# Altium PCB PCB-rev3.PcbDoc
Units mil, origin at the board's own origin, x right, y up, seen from the top; angles counter-clockwise.
Board outline 2110 x 2435.83 mil, 2 copper layers (Top Layer, Bottom Layer); 24 components, 81 nets, 312 pads, 171 vias.
Unrouted connection lines stored in the file: 1.
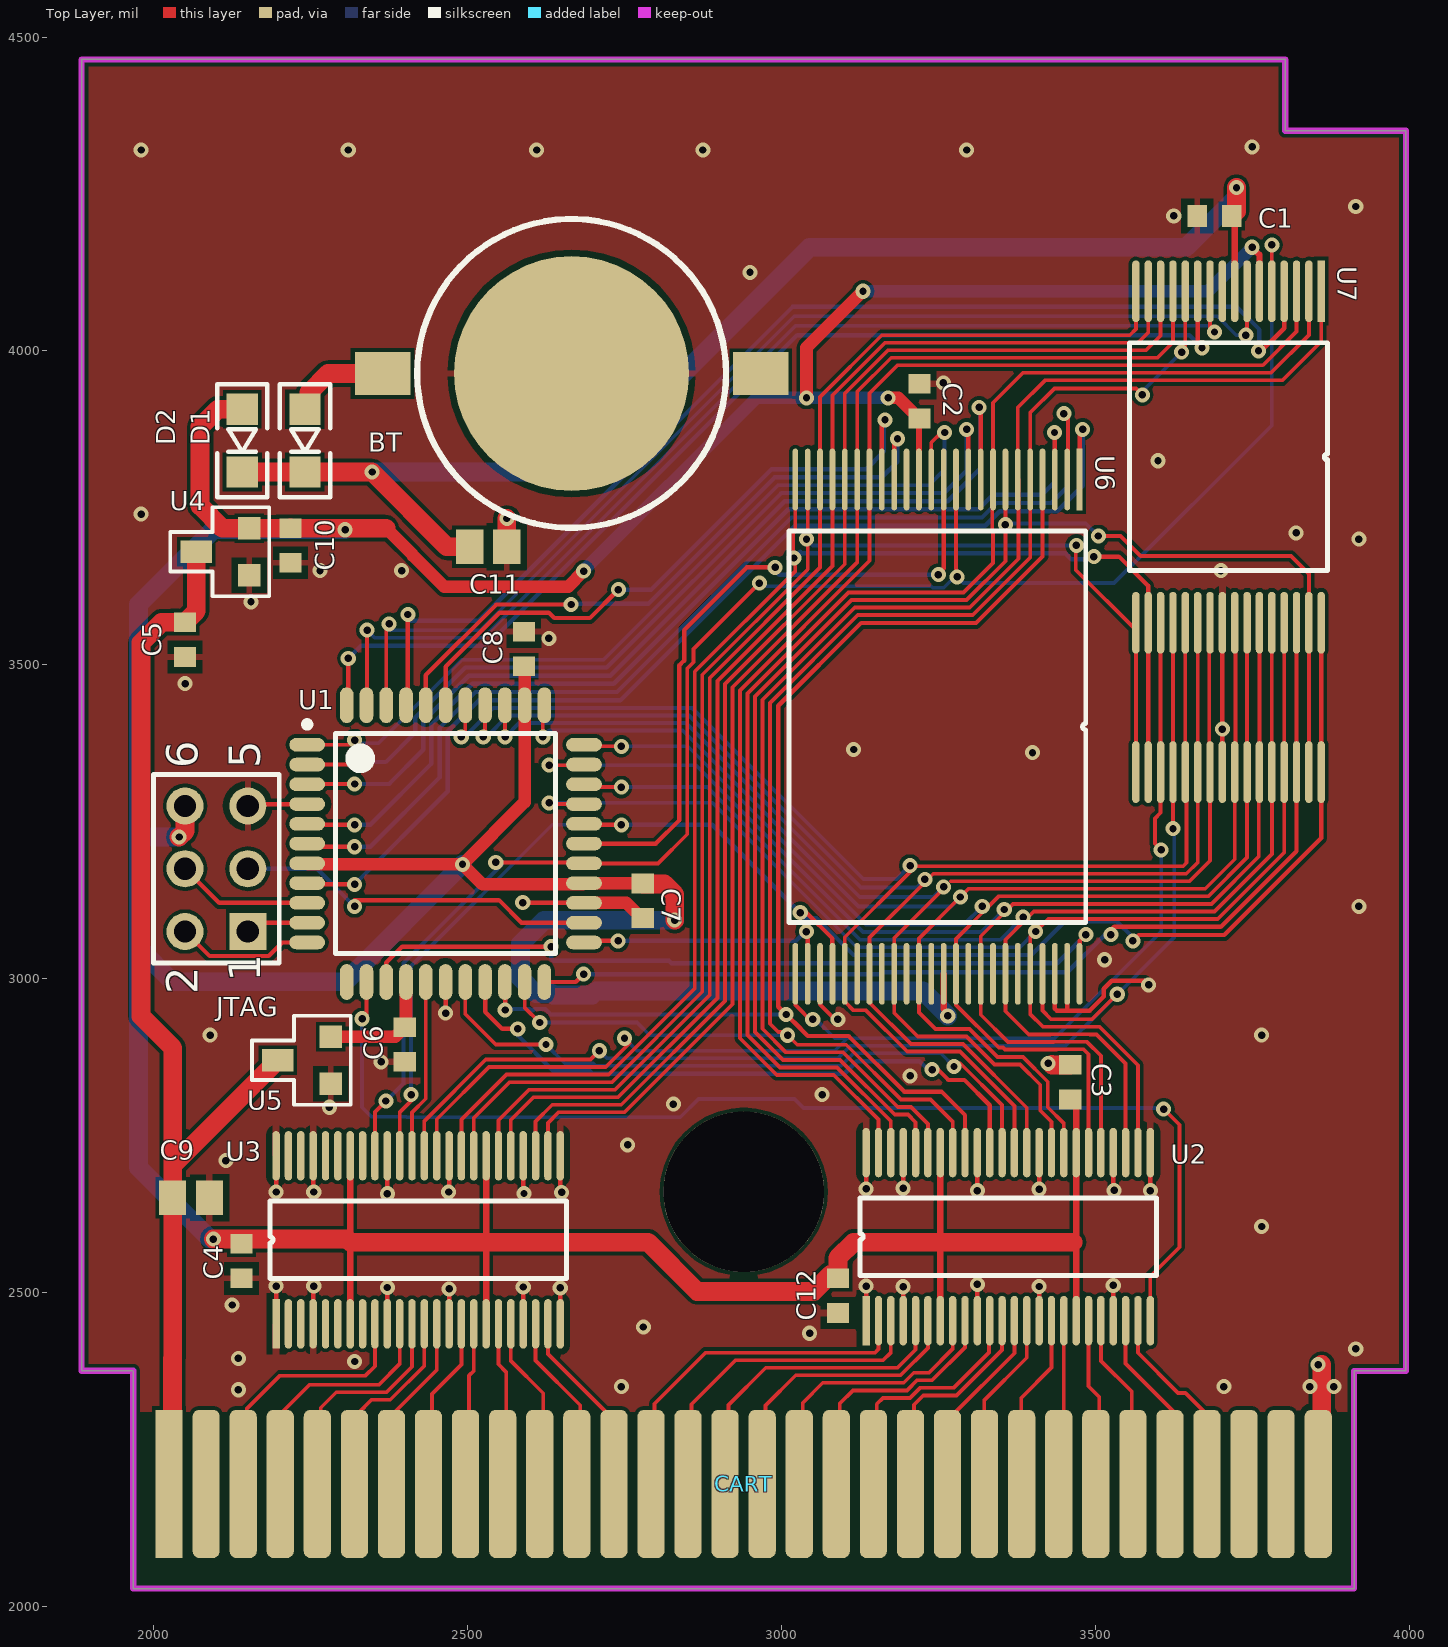
[diagram p0: Top Layer view]
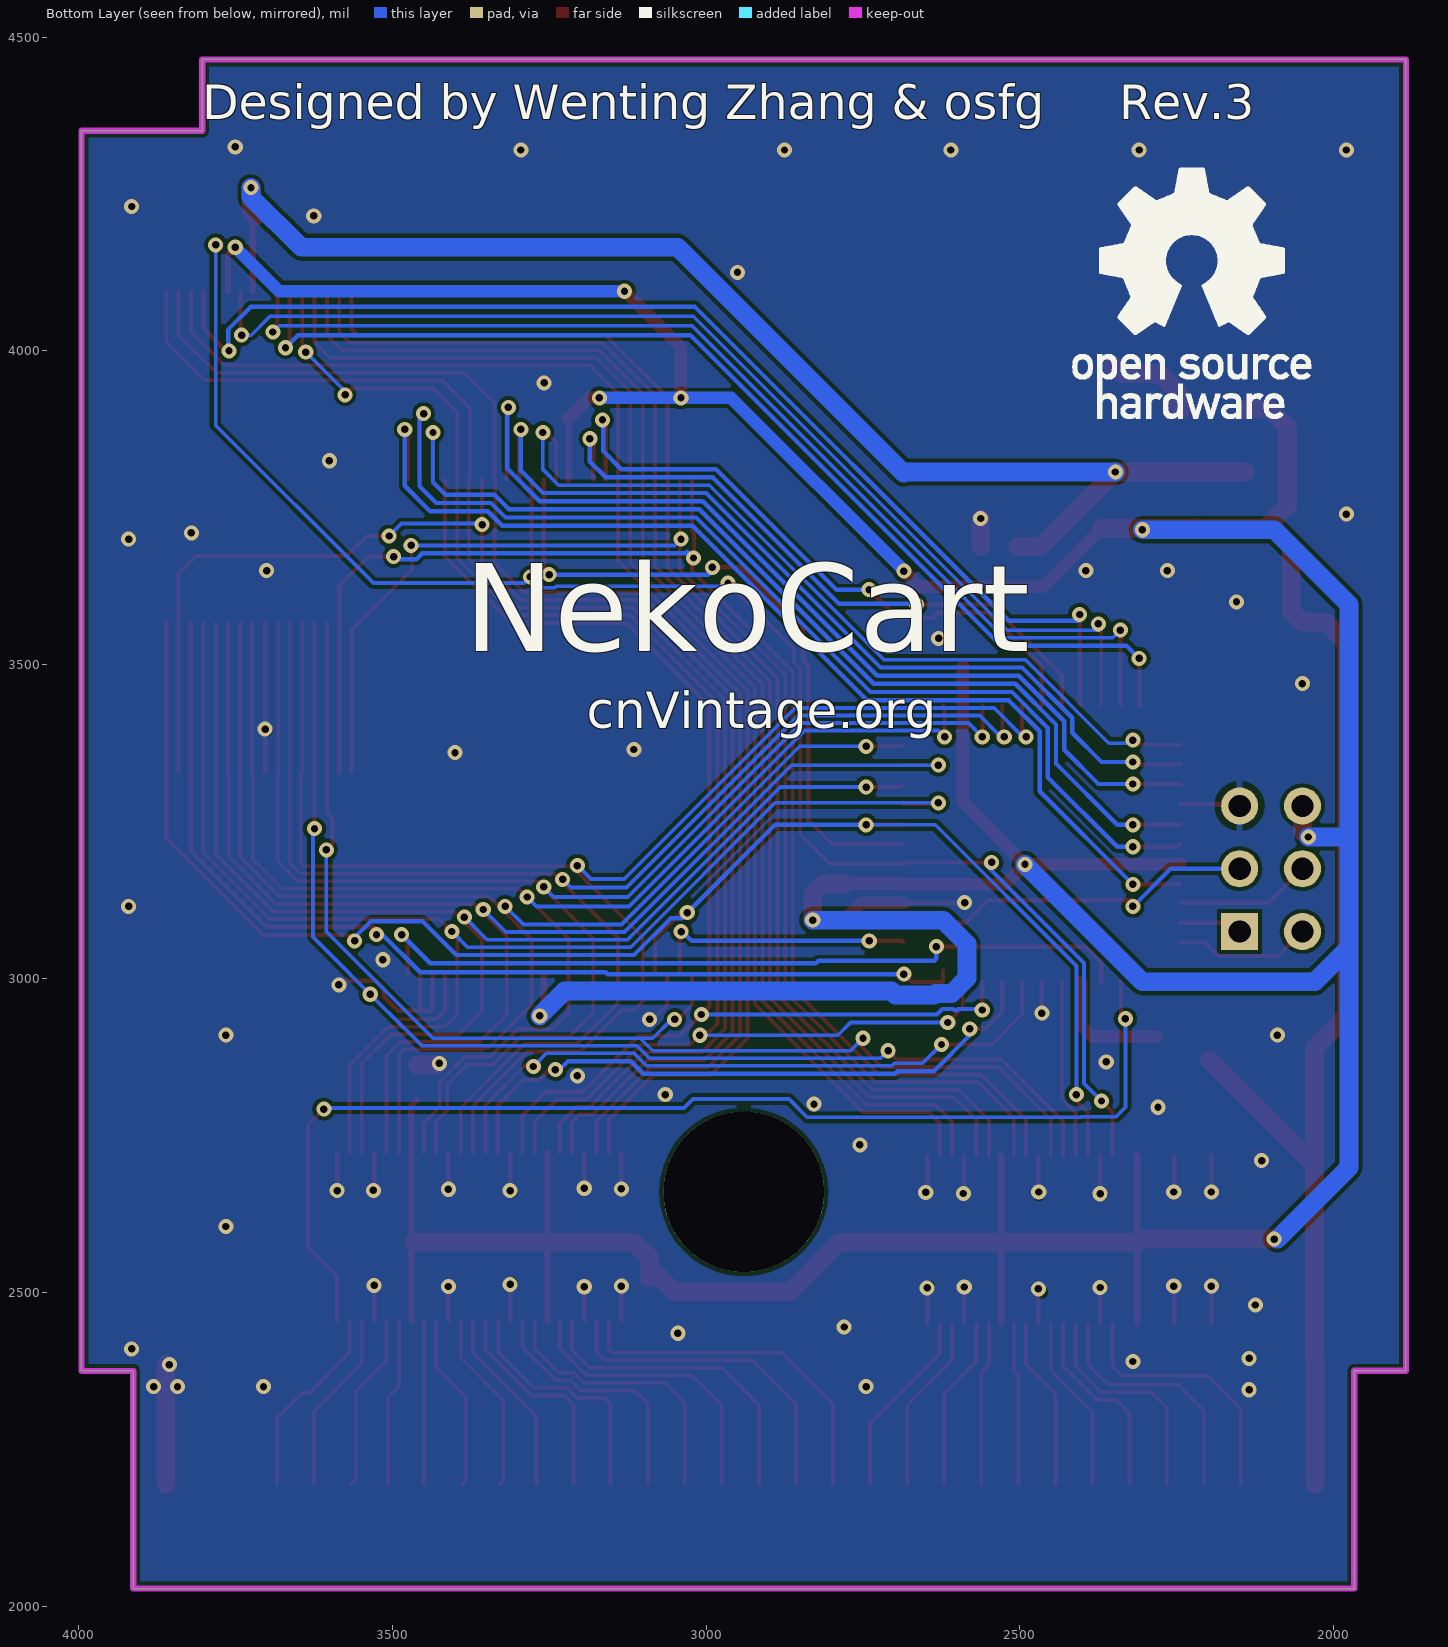
[diagram p1: Bottom Layer view, seen from below]

## Layer stack, top to bottom
Top Solder: solder mask 0.4, Solder Resist, Dk 3.5
Top Layer: signal copper 1.4
Dielectric 1: dielectric 12.6, FR-4, Dk 4.8
Bottom Layer: signal copper 1.4
Bottom Solder: solder mask 0.4, Solder Resist, Dk 3.5

## Board outline
1967.4,2028.35 1967.4,2375.16 1885.04,2375.16 1885.04,4464.17 1885,4464.17 3802.56,4464.17 3802.56,4350.55 3995,4350.55 3995,2375 3912.36,2375 3912.36,2028.35

## Design rules (kind name [scope] priority, off if disabled: settings)
Clearance [All] p1: gap=6 ignorepadtopadclearanceinfootprint=FALSE except(0: Arc-Hole Track-Hole SMDPad-Hole THPad-Hole Via-Hole Fill-Hole Poly-Hole Region-Hole Text-Hole)
ComponentClearance [All] p1 off: gap=10 collisioncheckmode=3 verticalgap=10 showdistances=FALSE
HoleSize [All] p1: absolutevalues=TRUE maxlimit=400 minlimit=11.81 maxpercent=80.000 minpercent=20.000
MinimumSolderMaskSliver [All] p1 off: minsoldermaskwidth=10
PlaneConnect [All] p1: planeconnectstyle=Direct reliefexpansion=20 reliefentries=4 reliefconductorwidth=10 reliefairgap=10
PolygonConnect PolygonConnect_1 [IsVia] p1: connectstyle=Direct reliefconductorwidth=10 reliefentries=4 polygonreliefangle="90 Angle" airgapwidth=10
PolygonConnect [All] p2: connectstyle=Relief reliefconductorwidth=10 reliefentries=2 polygonreliefangle="90 Angle" airgapwidth=10
RoutingVias [All] p1: holewidth=11.81 width=24 viastyle="Through Hole" minholewidth=11.81 minwidth=24 maxholewidth=11.81 maxwidth=50
SilkToSilkClearance [All] p1: silktosilkclearance=0
SilkToSolderMaskClearance [IsPad] p1: minsilkscreentomaskgap=0 clearancetoexposedcopper=TRUE
SolderMaskExpansion [All] p1: expansion=4
Width [All] p1: maxlimit=30 minlimit=6 preferedwidth=6 minimp=50.000000 maximp=50.000000 favimp=50.000000
24 further rules are at their usual default settings.

## Components (designator, comment, footprint, x,y, rotation, side; value= is the part's Value field where it differs from the comment)
BT "CR1220" CR1220_SOCKET 2665.82,3964 r0 top
C1 "104" 1608[0603] 3690,4215 r0 top value=100pF
C2 "104" 1608[0603] 3220,3920 r270 top value=100pF
C3 "104" 1608[0603] 3460,2835 r270 top value=100pF
C4 "104" 1608[0603] 2140,2550 r90 top value=100pF
C5 "104" 1608[0603] 2050,3540 r90 top value=100pF
C6 "104" 1608[0603] 2400,2895 r90 top value=100pF
C7 "104" 1608[0603] 2779,3124 r90 top value=100pF
C8 "104" 1608[0603] 2590,3525 r270 top value=100pF
C9 "106" C0805 2059.53,2651 r180 top value=100pF
C10 "104" 1608[0603] 2218,3690 r270 top value=100pF
C11 "106" C0805 2533,3688 r180 top value=100pF
C12 "104" 1608[0603] 3090,2495 r90 top value=100pF
CART "GBCart" GB_CART 2024.49,2195 r90 top
D1 "MBR0530" 0805D 2289,3880 r270 top
D2 "MBR0530" 0805D 2189,3880 r270 top
JTAG "Header 3X2" HDR2X3 2150,3075 r90 top
U1 "XC2C64A" 44A_L 2465,3215 r0 top
U2 "SN74LVTH162245" TSOP48 3135,2455 r90 top
U3 "SN74LVTH162245" TSOP48 2195,2450 r90 top
U4 "6209" SOT-23 2110,3680 r90 top
U5 "6209" SOT-23 2240,2870 r90 top
U6 "MX29LV640" TSOP48L 3475,3795 r270 top
U7 "IS62LV1024LL" TSOP32 3860,4095 r270 top

## Footprints (in the part's own frame and the unit in brackets; to place one, negate y for a bottom-side part, rotate by r counter-clockwise, add the part's x,y. Pads: shape width x height; smd on the part's side, far side on the other; paste and mask are expansions set on the pad)
44A_L [mm] "44-Pin Thin Quad Flat Pack 0.8 mm Pitch, IPC High Density"
  oval 1.45x0.55 smd: 1(-5.6,4) 2(-5.6,3.2) 3(-5.6,2.4) 4(-5.6,1.6) 5(-5.6,0.8) 6(-5.6,0) 7(-5.6,-0.8) 8(-5.6,-1.6) 9(-5.6,-2.4) 10(-5.6,-3.2) 11(-5.6,-4) 23(5.6,-4) 24(5.6,-3.2) 25(5.6,-2.4) 26(5.6,-1.6) 27(5.6,-0.8) 28(5.6,0) 29(5.6,0.8) 30(5.6,1.6) 31(5.6,2.4) 32(5.6,3.2) 33(5.6,4)
  oval 0.55x1.45 smd: 12(-4,-5.6) 13(-3.2,-5.6) 14(-2.4,-5.6) 15(-1.6,-5.6) 16(-0.8,-5.6) 17(0,-5.6) 18(0.8,-5.6) 19(1.6,-5.6) 20(2.4,-5.6) 21(3.2,-5.6) 22(4,-5.6) 34(4,5.6) 35(3.2,5.6) 36(2.4,5.6) 37(1.6,5.6) 38(0.8,5.6) 39(0,5.6) 40(-0.8,5.6) 41(-1.6,5.6) 42(-2.4,5.6) 43(-3.2,5.6) 44(-4,5.6)
  silkscreen extent -5.72,-4.45 4.45,4.95, body extent -5,-5 5,5, height 1.2
0805D [mil]
  rect 50x50 smd: A(-27,-48) K(73,-48)
  silkscreen extent -67,-88 113,-8
1608[0603] [mm] "Chip Capacitor, Body 1.6x0.8mm, IPC High Density"
  rect 0.8x0.9 smd: 1(-0.7,0) 2(0.7,0)
  body extent -0.87,-0.48 0.87,0.48, height 1.3
C0805 [mm] "Chip Capacitor, Body 2.0x1.3mm, IPC High Density"
  rect 1.1x1.4 smd: 1(-0.75,0) 2(0.75,0)
  body extent -1.1,-0.72 1.1,0.72, height 1.4
CR1220_SOCKET [mm]
  rect 2.25x1.75 smd: 1(-7.65,0) 1(7.65,0)
  round 9.5 smd: 2(0,0)
  silkscreen extent -6.25,-6.25 6.25,6.25
GB_CART [mm]
  rect 6x1.1 smd: 1(0,0)
  rrect50% 6x1.1 smd: 2(0,-1.5) 3(0,-3) 4(0,-4.5) 5(0,-6) 6(0,-7.5) 7(0,-9) 8(0,-10.5) 9(0,-12) 10(0,-13.5) 11(0,-15) 12(0,-16.5) 13(0,-18) 14(0,-19.5) 15(0,-21) 16(0,-22.5) 17(0,-24) 18(0,-25.5) 19(0,-27) 20(0,-28.5) 21(0,-30) 22(0,-31.5) 23(0,-33) 24(0,-34.5) 25(0,-36) 26(0,-37.5) 27(0,-39) 28(0,-40.5) 29(0,-42) 30(0,-43.5) 31(0,-45) 32(0,-46.5)
HDR2X3 [mm] "Connector; Header; 3x2 Position"
  rect 1.5x1.5 hole 0.9: 1(0,0)
  round 1.5 hole 0.9: 2(0,2.54) 3(2.54,0) 4(2.54,2.54) 5(5.08,0) 6(5.08,2.54)
  silkscreen extent -1.27,-1.27 6.35,3.81
SOT-23 [mil]
  rect 36x36 smd: 1(-37.4,-42.18) 2(37.4,-42.18)
  rect 36x50 smd: 3(0,42.18)
  silkscreen extent -71,-74 71,83, body extent -55,-51 55,45, height 43
TSOP32 [mm]
  rect 2.5x0.3 smd: 1(0,0)
  oval 2.5x0.3 smd: 2(0,-0.5) 3(0,-1) 4(0,-1.5) 5(0,-2) 6(0,-2.5) 7(0,-3) 8(0,-3.5) 9(0,-4) 10(0,-4.5) 11(0,-5) 12(0,-5.5) 13(0,-6) 14(0,-6.5) 15(0,-7) 16(0,-7.5) 17(13.412,-7.5) 17(19.457,-7.5) 18(13.412,-7) 18(19.457,-7) 19(13.412,-6.5) 19(19.457,-6.5) 20(13.412,-6) 20(19.457,-6) 21(13.412,-5.5) 21(19.457,-5.5) 22(13.412,-5) 22(19.457,-5) 23(13.412,-4.5) 23(19.457,-4.5) 24(13.412,-4) 24(19.457,-4) 25(13.412,-3.5) 25(19.457,-3.5) 26(13.412,-3) 26(19.457,-3) 27(13.412,-2.5) 27(19.457,-2.5) 28(13.412,-2) 28(19.457,-2) 29(13.412,-1.5) 29(19.457,-1.5) 30(13.412,-1) 30(19.457,-1) 31(13.412,-0.5) 31(19.457,-0.5) 32(13.412,0) 32(19.457,0)
  silkscreen extent 2.08,-7.75 11.3,0.25
TSOP48 [mm]
  rect 2x0.3 smd: 1(0,0)
  oval 2x0.3 smd: 2(0,-0.5) 3(0,-1) 4(0,-1.5) 5(0,-2) 6(0,-2.5) 7(0,-3) 8(0,-3.5) 9(0,-4) 10(0,-4.5) 11(0,-5) 12(0,-5.5) 13(0,-6) 14(0,-6.5) 15(0,-7) 16(0,-7.5) 17(0,-8) 18(0,-8.5) 19(0,-9) 20(0,-9.5) 21(0,-10) 22(0,-10.5) 23(0,-11) 24(0,-11.5) 25(6.8,-11.5) 26(6.8,-11) 27(6.8,-10.5) 28(6.8,-10) 29(6.8,-9.5) 30(6.8,-9) 31(6.8,-8.5) 32(6.8,-8) 33(6.8,-7.5) 34(6.8,-7) 35(6.8,-6.5) 36(6.8,-6) 37(6.8,-5.5) 38(6.8,-5) 39(6.8,-4.5) 40(6.8,-4) 41(6.8,-3.5) 42(6.8,-3) 43(6.8,-2.5) 44(6.8,-2) 45(6.8,-1.5) 46(6.8,-1) 47(6.8,-0.5) 48(6.8,0)
  silkscreen extent 1.84,-11.75 4.96,0.25
TSOP48L [mm]
  rect 2.5x0.23 smd: 1(0,0)
  oval 2.5x0.23 smd: 2(0,-0.5) 3(0,-1) 4(0,-1.5) 5(0,-2) 6(0,-2.5) 7(0,-3) 8(0,-3.5) 9(0,-4) 10(0,-4.5) 11(0,-5) 12(0,-5.5) 13(0,-6) 14(0,-6.5) 15(0,-7) 16(0,-7.5) 17(0,-8) 18(0,-8.5) 19(0,-9) 20(0,-9.5) 21(0,-10) 22(0,-10.5) 23(0,-11) 24(0,-11.5) 25(20,-11.5) 26(20,-11) 27(20,-10.5) 28(20,-10) 29(20,-9.5) 30(20,-9) 31(20,-8.5) 32(20,-8) 33(20,-7.5) 34(20,-7) 35(20,-6.5) 36(20,-6) 37(20,-5.5) 38(20,-5) 39(20,-4.5) 40(20,-4) 41(20,-3.5) 42(20,-3) 43(20,-2.5) 44(20,-2) 45(20,-1.5) 46(20,-1) 47(20,-0.5) 48(20,0)
  silkscreen extent 2.08,-11.75 17.92,0.25

## Part data
C1 C2 C3 C4 C5 C6 C7 C8 C9 C10 C11 C12: library part "Cap Semi", "Capacitor (Semiconductor SIM Model)", LatestRevisionDate=29-May-2009, LatestRevisionNote="IPC-7351 Footprint Added.", PackageDescription="Chip Capacitor", PackageReference=C1206, Published=8-Jun-2000, Publisher="Altium Limited"
D1 D2: library part 1N4148
JTAG: "Header, 3-Pin, Dual row", LatestRevisionDate=17-Jul-2002, LatestRevisionNote="Re-released for DXP Platform.", Publisher="Altium Limited"
BT: LatestRevisionDate=17-Jul-2002, LatestRevisionNote="Re-released for DXP Platform.", PackageDescription="Battery; 2 Leads", PackageReference=BAT-2, Published=24-Mar-1999, Publisher="Altium Limited"

## Free pads (board coordinates)
  round 255.91 hole 255.91: 0(2940,2660.32)

## Via types
v1: diameter 24.02, hole 11.81, Top Layer to Bottom Layer, tented both sides, 169 vias
v2: diameter 24.02, hole 11.81, Top Layer to Bottom Layer, 2 vias

## Nets (pads, with @x,y where several pads share a name; then routed paths per layer and width w, separated by ;. In a path a pad name is that pad's centre, name@x,y a point inside that pad or via, vN(x,y) a via of type N, cw(c..) or ccw(c..) an arc to the next point about the centre after c; other vN are vias at no path point)
1V8: C6.2 U1.15 U5.2 | length 196.9
  Top Layer w20: U5.2 2384.84,2907.4 C6.2 2402.01,2924.57 U1.15
3V3: C2.2 C3.2 C4.2 C7.2 C8.2 C10.1 C12.2 D2.A JTAG.6 U1.7 U1.26 U1.35 U2.7 U2.18 U2.31 U2.42 U3.7 U3.18 U3.31 U3.42 U4.2 U6.14 U6.37 U7.6 | length 9438.2
  Top Layer w10: U3.7 2313.11,2580 U3.42 ; U3.18 2529.64,2574.64 2535,2580 2529.64,2585.36 U3.31 ; U6.14 3219.09,3891.54 C2.2 ; U2.7 3253.11,2576.89 3250,2580 3253.11,2583.11 U2.42 ; 3258.47,2951.53 U6.37 ; C3.2 3469.64,2797.8 U2.31 3469.64,2584.64 ; 3465,2580 3469.64,2584.64 ; U2.18 3469.64,2584.64 ; v1(3750,4165) 3761.57,4153.43 U7.6
  Top Layer w20: U1.7 2246.04,3181.99 v1(2491.99,3181.99) ; 2369.94,3717.5 2413,3674.44 2413,3674 2463,3624 2653.39,3624 2660.01,3624.01 v1(2685,3649) ; C8.2 2590.98,3496.46 U1.35 2590.98,3280.98 v1(2491.99,3181.99) ; C7.2@2778.78,3151.78 2685.7,3151.78 U1.26 2683.46,3150 2523.98,3150 v1(2491.99,3181.99) ; v1(3040,3925) 3040,4005 v1(3130,4095) ; v1(3170,3925) 3186.47,3925 3219.03,3892.44 C2.2
  Top Layer w30: v2(2040.53,3225.53) 2050,3235 JTAG.6 ; v1(2095,2585) 2308.11,2585 2313.11,2580 2535,2580 2787.59,2580 2866.07,2501.52 3051.52,2501.52 C12.2@3078.7,2528.7 ; D2.A 2102,3907 2074,3879 2074,3753 2109.6,3717.4 U4.2 C10.1@2205.16,3717.4 ; C10.1 2218.06,3717.5 2369.94,3717.5 ; C7.2@2778.78,3151.78 C7.2 2779.75,3150.81 2813.41,3150.81 2830.01,3134.21 v2(2830.01,3093.01) ; C12.2 3090,2555 3115,2580 3250,2580 3465,2580
  Bottom Layer w20: v1(2685,3649) 2685,3650 2960,3925 v1(3040,3925) v1(3170,3925) ; v1(3130,4095) 3680,4095 v1(3750,4165)
  Bottom Layer w30: v2(2040.53,3225.53) 1976.53,3225.53 1976,3225 ; v1@2090,2585 1976,2699 1976,3049 ; v1(2305,3715) 2095,3715 1976,3596 1976,3225 ; v1(2491.99,3181.99) 2305,2995 2030,2995 1976,3049 ; v2(2830.01,3093.01) 2622.01,3093.01 2584.42,3055.42 2584.42,3000.58 2608.99,2976.01 2634.06,2976.01 2636.07,2973.99 2698.67,2973.99 2704.68,2980 3225.65,2980 v1(3265,2940.65) ; 1976,3049 1976,3225
5V: C5.2 C9.2 CART.1 U4.3 U5.3 | length 1801.1
  Top Layer w30: CART.1@2030,2195 2030,2394.53 2030.47,2395 2030.47,2702.65 ; U4.3 2067.82,3585.38 C5.2 2012.56,3567.56 1980,3535 1980,2940 2030.47,2889.53 2030.47,2702.65 ; U5.3 2030.47,2702.65
A0: U3.36 U6.45 U7.20 | length 2083.5
  Top Layer w6: U3.36 2431.22,2773.19 2529.03,2871 2696,2871 v1(2710,2885) ; U6.45 3415.95,2949.05 3429.69,2935.31 3495.02,2935.31 3534.71,2975 v1(3535,2975) ; v1(3623.78,3238.78) 3623.78,3328.97 U7.20@3623.78,3566.97
  Bottom Layer w6: v1(2710,2885) 2722,2873 3089.97,2873 3109.97,2893 3452.71,2893 3505.72,2946.01 3505.72,2945.72 3626.01,3066.01 3626.01,3236.55 v1(3623.78,3238.78)
A1: U3.35 U6.25 U7.19 | length 2030.2
  Top Layer w6: U3.35 2450.91,2775.91 2534,2859 2720.06,2859 2758.03,2896.97 v1(2750,2905) ; U6.25 3022.24,2957.76 3050,2930 v1(3050,2935) ; U7.19@3604.09,3566.97 3604.09,3328.97 3604.09,3264.09 3595,3255 3595,3215 v1(3605,3205)
  Bottom Layer w6: v1(2750,2905) 2770,2885 3085,2885 3105,2905 ; v1(3050,2935) 3055,2935 3085,2905 3105,2905 ; v1(3605,3205) 3605,3075 3435,2905 3105,2905
A2: U3.33 U6.24 U7.18 | length 2286.2
  Top Layer w6: U3.33 2490.28,2775.28 2562,2847 2725.03,2847 2862,2983.97 2862,3488.97 3022.24,3649.22 v1@3022.24,3670 ; v1(3020,3670) 3018.99,3671.01 3018.99,3709.71 3022.24,3712.96 U6.24
  Top Layer w7: v1(3497.71,3672.29) 3537.71,3672.29 3584.41,3625.59 U7.18@3584.41,3328.97
  Bottom Layer w7: v1(3020,3670) 3029.79,3679.79 3032.08,3677.5 3452.08,3677.5 3461.79,3667.79 3493.21,3667.79 v1(3497.71,3672.29)
A3: U3.32 U6.23 U7.17 | length 2264.3
  Top Layer w6: U3.32 2509.96,2777.99 2566.97,2835 2730,2835 2874,2979 2874,3484 3041.93,3651.93 v1@3041.93,3701.93 ; v1(3040,3700) v1@3041.93,3701.93 ; U6.23 v1@3041.93,3701.93 ; v1(3470,3690) 3468.99,3688.99 3468.99,3651.01 3564.72,3555.28 U7.17@3564.72,3328.97
  Bottom Layer w6: v1(3040,3700) 3050,3690 3479.71,3690 3470,3680.29 v1(3470,3690)
A4: U3.30 U6.22 U7.16 | length 2109.7
  Top Layer w6: U3.30 2549.33,2774.33 2598,2823 2734.97,2823 2886,2974.03 2886,3479.03 3061.61,3654.64 U6.22 3061.61,3926.61 3160,4025 3555,4025 3565,4035 3565,4094.72 U7.16
A5: U3.29 U6.21 U7.15 | length 2113
  Top Layer w6: U3.29 2569.01,2775.01 2605,2811 2739.94,2811 2898,2969.06 2898,3474.06 3081.3,3657.36 U6.21 3081.3,3929.33 3164.97,4013 3568,4013 3584.41,4029.41 U7.15
A6: U3.27 U6.20 U7.14 | length 2094.9
  Top Layer w6: U3.27 2608.39,2772.39 2635,2799 2744.91,2799 2910,2964.09 2910,3469.09 3100.99,3660.07 U6.20 3100.99,3932.04 3169.94,4001 3581,4001 3604.09,4024.09 U7.14
A7: U3.26 U6.19 U7.13 | length 2099.6
  Top Layer w6: U3.26 2628.07,2770.07 2645,2787 2749.88,2787 2922,2959.12 2922,3464.12 3120.67,3662.79 U6.19 3120.67,3934.76 3174.91,3989 3599,3989 3623.78,4013.78 U7.13
A8: U2.47 U6.18 U7.3 | length 2225.1
  Top Layer w6: U2.47 3154.68,2775.32 3083.52,2846.48 2992.61,2846.48 2934,2905.09 2934,3459.15 3140.36,3665.5 U6.18 3140.36,3932.36 3185,3977 3767,3977 3820.63,4030.63 U7.3
A9: U2.46 U6.8 U7.2 | length 2230.4
  Top Layer w6: U2.46 3174.37,2772.6 3088.49,2858.48 2997.58,2858.48 2946,2910.06 2946,3454.18 3106.82,3615 3290,3615 3337.2,3662.2 3337.2,3711.76 3335.88,3713.09 3335.88,3793.68 U6.8 3337.2,3917.2 3385,3965 3780,3965 3840.32,4025.32 U7.2
A10: U2.44 U6.7 U7.31 | length 2353.3
  Top Layer w6: U2.44 3213.74,2771.26 3201.5,2783.5 3180.44,2783.5 3093.46,2870.48 3002.55,2870.48 2958,2915.03 2958,3449.21 3111.79,3603 3294.97,3603 3356.89,3664.92 v1(3356.89,3723.11) U6.7 ; v1(3505,3705) 3540.29,3705 3572.29,3673 3812,3673 3840.32,3644.68 3840.32,3566.97 U7.31@3840.32,3328.97
  Bottom Layer w6: v1(3356.89,3723.11) 3355,3725 3485,3725 v1(3505,3705)
A11: U2.43 U6.6 U7.1 | length 2246.2
  Top Layer w6: U2.43 3233.43,2768.55 3206.47,2795.5 3185.41,2795.5 3098.43,2882.48 3007.52,2882.48 2970,2920 2970,3444.24 3116.76,3591 3299.94,3591 3377.9,3668.96 3377.9,3795 U6.6 3376.57,3909.57 3420,3953 3798,3953 3860,4015 U7.1
A12: U1.21 U2.41 U6.5 U7.12 | length 2528.9
  Top Layer w6: U1.21 2590.98,2954.02 v1(2615,2930) ; U2.41 3272.8,2772.2 3237.5,2807.5 3190.38,2807.5 3103.4,2894.48 3025.23,2894.48 v1(3010,2909.71) 3004.71,2915 2995,2915 2982,2928 2982,3439.27 3121.73,3579 3304.91,3579 3396.26,3670.35 U6.5 3396.26,3901.26 3435,3940 3565,3940 v1(3575,3930) ; v1(3637.72,3998.01) 3643.47,4003.76 U7.12
  Top Layer w7: U1.21@2590,2995.51 U1.21
  Bottom Layer w6: v1(2615,2930) 2770,2930 2790.29,2909.71 v1(3010,2909.71) ; v1(3575,3930) 3575,3935 3580,3940 3579.71,3940 v1(3637.72,3998.01)
A13: U1.20 U2.40 U6.4 | length 2048.4
  Top Layer w7: U1.20 2560,2994.02 v1(2560,2950) ; U2.40 3292.48,2782.52 3255,2820 3195.56,2820 3107.06,2908.5 3042.06,2908.5 3020.28,2930.28 3020.01,2930.28 v1(3007.51,2942.79) 2995,2955.29 2995,3434.59 3126.91,3566.5 3310.09,3566.5 3415.95,3672.36 U6.4
  Bottom Layer w7: v1(2560,2950) 2561.51,2951.51 2598.84,2951.51 2600.86,2949.49 2604.08,2949.49 2606.09,2951.51 2623.91,2951.51 2632.63,2942.79 v1(3007.51,2942.79)
A14: U1.19 U2.38 | length 1011.5
  Top Layer w7: U1.19 2527.99,2947.01 2555,2920 v1(2580,2920) ; v1(3240,2855) 3249.58,2855 3266.09,2838.49 3291.51,2838.49 3331.85,2798.15 U2.38
  Bottom Layer w7: v1(2580,2920) 2579.58,2919.58 2579.58,2910 2637.08,2852.5 2695.11,2852.5 2699.11,2848.5 3100.12,2848.5 3120.12,2868.5 3220,2868.5 3233.5,2855 v1(3240,2855)
A15: U1.18 U2.37 | length 1062.6
  Top Layer w6: U1.18 2496.5,2943.5 2545,2895 v1(2625,2895) ; v1(3275,2860) 3280,2865 3285,2865 3351.53,2798.47 U2.37
  Bottom Layer w6: v1(2625,2895) 2655,2865 2700.29,2865 2704.29,2861 3094.94,2861 3114.94,2881 3254,2881 v1(3275,2860)
CS: U1.16 U3.37 | length 285.9
  Top Layer w6: U3.37 2411.53,2786.53 2433.5,2808.5 U1.16
D0: U1.38 U2.36 U6.29 U7.21 | length 2404.1
  Top Layer w6: v1(2490,3385) 2496.5,3391.5 U1.38 ; v1(3205,3180) 3205,3170 3100.99,3065.99 U6.29 3100.99,2963.47 3115.07,2949.39 3134.75,2949.39 3200.5,2883.64 3284.39,2883.64 3371.22,2796.81 U2.36 ; v1@3214,3179 3640.06,3179 3645.53,3184.47 3645.53,3326.9 3643.47,3328.97 U7.21@3643.47,3566.97
  Bottom Layer w6: v1(2490,3385) 2495,3385 2541,3431 2857.79,3431 3130.31,3158.49 3183.49,3158.49 v1(3205,3180) v1@3210,3180
D1: U1.37 U2.35 U6.31 U7.22 | length 2338.8
  Top Layer w6: v1(2525,3385) 2527.99,3387.99 U1.37 ; v1(3228.53,3157.99) 3228.53,3153.53 3140.36,3065.36 U6.31 3140.36,2961.62 3206.33,2895.64 3289.36,2895.64 3390.91,2794.09 U2.35 ; v1@3230.76,3155.76 3242,3167 3645.03,3167 3663.15,3185.12 3663.15,3328.97 U7.22@3663.15,3566.97
  Bottom Layer w6: v1(2525,3385) 2530,3385 2564,3419 2852.82,3419 3126.82,3145 3215.54,3145 v1(3228.53,3157.99)
D2: U1.36 U2.33 U6.33 U7.23 | length 2325.2
  Top Layer w6: U1.36 2559.49,3385.51 v1(2560,3385) ; v1(3258.54,3145.99) v1@3260.99,3145.99 ; v1@3265,3150 v1@3260.99,3145.99 ; 3270,3155 3650,3155 3682.84,3187.84 3682.84,3328.97 3681.47,3330.33 3681.47,3566.97 U7.23@3682.84,3566.97 ; U2.33 3430.28,2772.03 3412.28,2790.03 3412.28,2830.75 3380.03,2863 3339.31,2863 3294.67,2907.64 3217.36,2907.64 3179.72,2945.28 U6.33 3179.72,3064.72 v1@3260.99,3145.99
  Bottom Layer w6: v1(2560,3385) 2582,3407 2847.85,3407 3124.85,3130 3242.55,3130 v1(3258.54,3145.99)
D3: U1.34 U2.32 U6.35 U7.25 | length 2269.5
  Top Layer w6: v1(2620,3385) 2620,3432.99 U1.34 ; U2.32 3449.96,2769.32 3424.28,2795 3424.28,2835.72 3385,2875 3344.28,2875 3299.64,2919.64 3245.36,2919.64 3219.09,2945.91 U6.35 3219.09,3064.09 v1(3285,3130) 3298,3143 3675.12,3143 3722.2,3190.09 3722.2,3328.97 3723.49,3330.25 3723.49,3566.97 U7.25@3722.2,3566.97
  Bottom Layer w6: v1(2620,3385) 2630,3395 2842.88,3395 3122.88,3115 3270,3115 v1(3285,3130)
D4: U1.33 U2.30 U6.38 U7.26 | length 2165.5
  Top Layer w6: U1.33 2687.95,3370 v1(2745,3370) ; v1(3320,3115) 3320,3105 3278.15,3063.15 U6.38 3278.15,2958.1 3346.25,2890 3353.03,2890 3356.03,2887 3438.25,2887 3438.56,2887.31 3481.44,2887.31 3489.33,2879.42 U2.30 ; v1@3325,3110 3346,3131 3680.09,3131 3741.89,3192.8 3741.89,3328.97 U7.26@3741.89,3566.97
  Bottom Layer w6: v1(2745,3370) 2850.91,3370 3134.91,3086 3291,3086 v1(3320,3115)
D5: U1.32 U2.29 U6.40 U7.27 | length 2277.7
  Top Layer w6: v1(2630,3340) 2684.49,3340 U1.32 ; v1(3354.98,3109.99) v1@3354.98,3104.98 ; U2.29 3509.01,2876.99 3487,2899 3486.72,2899 3486.42,2899.31 3433.59,2899.31 3433.28,2899 3361,2899 3317.52,2942.48 U6.40 3317.52,3067.52 v1@3354.98,3104.98 ; U7.27@3761.57,3566.97 3761.57,3328.97 3760.53,3327.92 3760.53,3194.47 3685.06,3119 3369,3119 v1@3354.98,3104.98
  Bottom Layer w6: v1(2630,3340) 2863.94,3340 3129.94,3074 3318.99,3074 v1(3354.98,3109.99)
D6: U1.31 U2.27 U6.42 U7.28 | length 2151.1
  Top Layer w6: U1.31 2689.96,3305 v1(2745,3305) ; v1(3385,3097.99) 3387.01,3100 3395,3100 3402,3107 3690.03,3107 3781.51,3198.49 3781.51,3328.71 3781.26,3328.97 U7.28@3781.26,3566.97 ; v1@3389,3094 3356.89,3061.89 U6.42 3356.89,2948.11 3394,2911 3428.31,2911 3428.61,2911.31 3491.39,2911.31 3491.69,2911 3502.03,2911 3548.39,2864.64 U2.27
  Bottom Layer w6: v1(2745,3305) 2881.97,3305 3124.97,3062 3349.01,3062 v1(3385,3097.99)
D7: U1.30 U2.26 U6.44 U7.29 | length 2230.9
  Top Layer w6: v1(2630,3280) 2632.01,3277.99 U1.30 ; U2.26 3568.07,2861.93 3506.69,2923.31 3416.69,2923.31 3396.26,2943.74 U6.44 3396.26,3066.26 v1(3405,3075) 3425,3095 3695,3095 3800.95,3200.95 3800.95,3328.97 U7.29@3800.95,3566.97
  Bottom Layer w6: v1(2630,3280) 2890,3280 3120,3050 3380,3050 v1(3405,3075)
DDIR: U1.13 U2.24 | length 1870.4
  Top Layer w6: v1(2332,2936) 2333,2936 2339.02,2942.02 U1.13 ; U2.24 3587.76,2525.76 3634,2572 3634,2767 v1(3609,2792)
  Bottom Layer w6: v1(2332,2936) 2332,2795 2347,2780 2402,2780 2403.01,2778.99 2838.99,2778.99 2868,2808 3021,2808 3035.01,2793.99 3607.01,2793.99 v1@3608,2793
GND: BT.2 C1.1 C2.1 C3.1 C4.1 C5.1 C6.1 C7.1 C8.1 C9.1 C10.2 C11.1 C12.1 CART.32 JTAG.5 U1.4 U1.17 U1.25 U2.1 U2.4 U2.10 U2.15 U2.21 U2.25 U2.28 U2.34 U2.39 U2.45 U2.48 U3.1 U3.4 U3.10 U3.15 U3.21 U3.24 U3.25 U3.28 U3.34 U3.39 U3.45 U3.48 U4.1 U5.1 U6.27 U6.46 U6.47 U7.24 | length 2629.2
  Top Layer w7: JTAG.5 2152.99,3277.99 U1.4 ; U3.1 v1(2195,2510) ; v1(2195,2660) U3.48 ; U3.4 2254.05,2509.05 v1(2255,2510) ; U3.45 2254.05,2660.95 v1(2255,2660) ; U3.10 v1(2372.16,2507.84) ; v1(2372.16,2657.16) U3.39 ; v1(2465,2945) U1.17 ; v1(2470,2660) 2470.59,2660.59 U3.34 ; U3.15 v1(2470.59,2505.59) ; v1(2588,3121) 2588.24,3120.76 2685.23,3120.76 U1.25 ; U3.21 v1(2588.7,2508.7) ; U3.28 2588.7,2656.3 v1(2590,2657.6) ; U3.24 v1(2647.76,2507.24) ; U3.25 2647.76,2657.24 v1(2650,2659.49) ; U6.27 3061.61,2958.8 3085.42,2935 v1(3090,2935) ; U2.1 v1(3135,2510) ; v1(3135,2665) U2.48 ; U2.4 v1(3194.05,2509.05) ; v1(3194.05,2665.95) U2.45 ; U2.10 v1(3312.16,2512.84) ; v1(3312.16,2662.16) U2.39 ; U2.15 v1(3410.59,2509.41) ; v1(3410.59,2664.41) U2.34 ; U6.46 3435.63,2952.18 3438.92,2948.89 3456.74,2948.89 ; U6.47 3455.32,2950.32 3456.74,2948.89 ; U2.21 v1(3528.7,2511.3) ; U2.28 3528.7,2661.3 v1(3530,2662.6) ; v1(3585,2990) 3578.49,2996.51 3526.09,2996.51 3513.49,2983.91 3513.49,2971.46 3490.92,2948.89 3456.74,2948.89 ; v1(3587.76,2662.24) U2.25 ; U7.24@3702.52,3328.97 v1(3702.48,3397.48) U7.24@3702.48,3566.93 ; U7.24@3702.48,3566.93 U7.24@3702.52,3566.97
  Top Layer w20: U1.25 2752.96,3120.51 2777.03,3096.44 C7.1
  Top Layer w30: C11.1 v1(2562.53,3733) ; v1@3430.94,2863 3431.38,2862.56 C3.1 ; CART.32@3860.71,2195 v1@3860.71,2385
  Bottom Layer w7: v1@2360,2865 v1(2362.44,2867.44) ; v1@2370,2510 v1(2372.16,2507.84) ; v1@2370,2655 v1(2372.16,2657.16) ; v1@2465,2500 v1(2470.59,2505.59) ; v1@2470,2655 v1(2470,2660) ; v1(2588.7,2508.7) v1@2590,2510 ; v1(2590,2657.6) v1@2590,2660 ; v1@2645,2510 v1(2647.76,2507.24) ; v1(2650,2659.49) v1@2650,2660 ; v1(3194.05,2509.05) v1@3195,2510 ; v1(3194.05,2665.95) v1@3195,2665 ; v1@3310,2515 v1(3312.16,2512.84) ; v1@3310,2660 v1(3312.16,2662.16) ; v1@3410,2510 v1(3410.59,2509.41) ; v1@3410,2665 v1(3410.59,2664.41) ; v1(3528.7,2511.3) v1@3530,2510 ; v1(3530,2662.6) v1@3530,2665 ; v1(3587.76,2662.24) v1@3590,2660 ; v1@3700,3395 v1(3702.48,3397.48)
  other v1: 2135,2345 2745,2350 3705,2350 3842,2350 3880,2350 3855,2385 2320,2390 2135,2395 3915,2410 3045,2435 2780,2445 2125,2480 3765,2605 2115,2710 2755,2735 2280,2795 2828,2800 3065,2815 3205,2845 3425,2865 2090,2910 3765,2910 3515,3030 3920,3115 3400,3360 3115,3365 2050,3470 2629.49,3542 2155,3600 2265,3650 2395,3650 3700,3650 3920,3700 3820,3710 1980,3740 3600,3825 3258,3949 2950,4125 3625,4215 3915,4230 1980,4320 2310,4320 2610,4320 2875,4320 3295,4320 3750,4325
NetBT_1: BT.1 D1.A | length 151.5
  Top Layer w30: D1.A 2247.43,3913.43 2247.43,3933.43 2278,3964 2339,3964 BT.1@2351.82,3976.82
NetC1_2: C1.2 C11.2 D1.K D2.K U7.8 | length 2156.9
  Top Layer w10: C1.2 3722.2,4210.35 U7.8
  Top Layer w30: D2.K D1.K v1(2348,3807) 2467,3688 C11.2 ; C1.2 3725,4222.44 v1(3725,4260)
  Bottom Layer w30: v1(2348,3807) 2683,3807 2685,3805 3045,4165 3645,4165 3725,4245 v1(3725,4260)
NetCART_3: CART.3 U3.9 | length 419.3
  Top Layer w6: CART.3@2148.11,2195 2148.11,2314.11 2201.44,2367.44 2337.44,2367.44 2352.48,2382.48 U3.9
NetCART_4: CART.4 U3.11 | length 396.6
  Top Layer w6: CART.4@2207.17,2195 2207.17,2312.17 2248,2353 2359.06,2353 2391.85,2385.79 U3.11
NetCART_5: CART.5 U3.12 | length 362.1
  Top Layer w6: CART.5@2266.22,2195 2266.22,2316.22 2291,2341 2371,2341 2411.53,2381.53 U3.12
NetCART_6: CART.6 U3.13 | length 316.5
  Top Layer w6: CART.6@2325.28,2195 2325.28,2307.28 2347,2329 2377,2329 2431.22,2383.22 U3.13
NetCART_7: CART.7 U3.14 | length 282.6
  Top Layer w6: CART.7@2384.33,2195 2384.33,2309.8 2450.91,2376.37 U3.14
NetCART_8: CART.8 U3.16 | length 274.4
  Top Layer w6: CART.8@2443.39,2195 2443.39,2338.39 2490.28,2385.28 U3.16
NetCART_9: CART.9 U3.17 | length 258.6
  Top Layer w6: CART.9@2502.44,2195 2502.44,2367.44 2509.96,2374.96 U3.17
  Top Layer w7: CART.9@2502.44,2195 CART.9@2502.78,2195.33
NetCART_10: CART.10 U3.19 | length 260
  Top Layer w6: U3.19 2549.33,2385.67 2561.5,2373.5 CART.10@2561.5,2195
NetCART_11: CART.11 U3.20 | length 276.3
  Top Layer w6: U3.20 2569.01,2390.99 2620.55,2339.45 CART.11@2620.55,2195
NetCART_12: CART.12 U3.22 | length 284.5
  Top Layer w6: U3.22 2608.39,2391.61 2679.61,2320.39 CART.12@2679.61,2195
NetCART_13: CART.13 U3.23 | length 300.8
  Top Layer w6: U3.23 2628.07,2401.93 2738.66,2291.34 CART.13@2738.66,2195
NetCART_14: CART.14 U2.2 | length 566
  Top Layer w6: CART.14@2797.72,2195 2797.72,2322.72 2879,2404 3149,2404 3154.68,2409.68 U2.2
NetCART_15: CART.15 U2.3 | length 529.2
  Top Layer w6: CART.15@2856.77,2195 2856.77,2321.77 2927,2392 3162,2392 3174.37,2404.37 U2.3
NetCART_16: CART.16 U2.5 | length 506.4
  Top Layer w6: CART.16@2915.83,2195 2915.83,2320.83 2975,2380 3185,2380 3213.74,2408.74 U2.5
NetCART_17: CART.17 U2.6 | length 464.9
  Top Layer w6: CART.17@2974.88,2195 2974.88,2319.88 3023,2368 3189.97,2368 3233.43,2411.45 U2.6
NetCART_18: CART.18 U2.8 | length 448.6
  Top Layer w6: CART.18@3033.94,2195 3033.94,2323.94 3066,2356 3194.94,2356 3210.94,2372 3235.03,2372 3272.8,2409.77 U2.8
NetCART_19: CART.19 U2.9 | length 407.1
  Top Layer w6: CART.19@3092.99,2195 3092.99,2322.99 3114,2344 3199.91,2344 3215.91,2360 3240,2360 3292.48,2412.48 U2.9
NetCART_20: CART.20 U2.11 | length 390.7
  Top Layer w6: CART.20@3152.05,2195 3152.05,2322.05 3162,2332 3204.88,2332 3220.88,2348 3274.06,2348 3330.53,2404.47 3330.53,2453.68 U2.11
NetCART_21: CART.21 U2.12 | length 349.2
  Top Layer w6: CART.21@3211.1,2195 3211.1,2321.1 3226,2336 3279.03,2336 3351.53,2408.51 U2.12
NetCART_22: CART.22 U2.13 | length 301.9
  Top Layer w6: CART.22@3270.16,2195 3270.16,2302.16 3371.22,2403.22 U2.13
NetCART_23: CART.23 U2.14 | length 290.7
  Top Layer w6: CART.23@3329.21,2195 3323,2201.21 3323,2328 3390.91,2395.91 U2.14
NetCART_24: CART.24 U2.16 | length 282.6
  Top Layer w6: CART.24@3388.27,2195 3382,2201.27 3382,2332 3430.28,2380.28 U2.16
NetCART_25: CART.25 U2.17 | length 261.1
  Top Layer w6: CART.25@3447.32,2195 3449.96,2197.64 U2.17
NetCART_26: CART.26 U2.19 | length 267.1
  Top Layer w6: U2.19 3489.33,2350.67 3506.38,2333.62 CART.26@3506.38,2195
NetCART_27: CART.27 U2.20 | length 283.4
  Top Layer w6: U2.20 3509.01,2390.99 3558,2342 3558,2202.43 CART.27@3565.43,2195
NetCART_28: CART.28 U2.22 | length 291.5
  Top Layer w6: U2.22 3548.39,2386.59 3624.49,2310.49 CART.28@3624.49,2195
NetCART_29: CART.29 U2.23 | length 314.6
  Top Layer w6: U2.23 3568.07,2403.9 3631.97,2340 3643.54,2340 3683.54,2300 CART.29@3683.54,2195
RAM_A13: U1.41 U7.4 | length 1883.8
  Top Layer w7: U1.41 2405,3438.46 v1(2405,3580) ; v1(3760,4000) 3765,4000 3800.95,4035.95 U7.4
  Bottom Layer w7: v1(2405,3580) 2405,3570 2517.67,3570 3017.67,4070 3725.42,4070 3761.51,4033.91 3761.51,4001.51 v1(3760,4000)
RAM_A14: U1.44 U7.11 | length 1750
  Top Layer w7: U1.44 2310,3437.95 v1(2310,3510) ; U7.11 3663.15,4011.85 v1(3670,4005)
  Bottom Layer w7: v1(2310,3510) 2330.5,3530.5 2530.5,3530.5 3025,4025 3650,4025 v1(3670,4005)
RAM_A15: U1.42 U7.7 | length 1796.7
  Top Layer w6: U1.42 2370.51,3560.51 v1(2375,3565) ; v1(3740,4025) 3741.89,4026.89 U7.7
  Bottom Layer w6: v1(2375,3565) 2375,3555 2520.35,3555 3020.35,4055 3694.71,4055 3724.71,4025 v1(3740,4025)
RAM_A16: U1.43 U7.10 | length 1768.2
  Top Layer w6: U1.43 2340,3436.46 v1(2340,3555) ; U7.10 3682.84,4027.16 3687.16,4027.16 v1(3690,4030)
  Bottom Layer w6: v1(2340,3555) 2352,3543 2525.32,3543 3022.32,4040 3680,4040 v1(3690,4030) v1@3685,4025
RAM_CS: U1.22 U7.30 | length 1675.8
  Top Layer w7: U1.22@2622.48,3012.48 U1.22 2672.53,2994.53 v1(2685,3007) ; v1(3525,3070) 3525,3077.5 3530,3082.5 3700.18,3082.5 3820.63,3202.95 3820.63,3328.97 U7.30@3820.63,3566.97
  Bottom Layer w7: v1(2685,3007) 3157,3007 3160,3010 3455.42,3010 3515.42,3070 v1(3525,3070) v1@3525,3075
RD: U1.29 U3.38 U6.28 U7.32 | length 2573.1
  Top Layer w6: U3.38 2391.85,2786.85 2410,2805 v1(2410,2815)
  Top Layer w7: U1.29 2686.97,3245 v1(2745,3245) ; v1(3030,3105) 3040,3105 3081.3,3063.7 U6.28 ; v1(3560,3060) 3569.5,3069.5 3705.56,3069.5 3860,3223.94 3860,3328.97 U7.32@3860,3566.97
  Bottom Layer w6: v1(2410,2815) 2410,3020 2635,3245 v1(2745,3245)
  Bottom Layer w7: v1(2745,3245) 2890,3245 v1(3030,3105) 3038.7,3096.3 3056.02,3096.3 3114.82,3037.5 3397.92,3037.5 3451.92,3091.51 3533.91,3091.51 3560,3065.42 v1(3560,3060)
ROM_A14: U1.5 U6.3 | length 1608.2
  Top Layer w7: U1.5 2246.02,3245 v1(2320,3245) ; v1(3435,3870) 3435.63,3869.37 U6.3
  Bottom Layer w7: v1(2320,3245) 2345,3245 2442.49,3342.49 2442.49,3404.68 2507.31,3469.5 2732.73,3469.5 3010.74,3747.51 3314.1,3747.51 3337.21,3770.62 3415,3770.62 3435,3790.62 v1(3435,3870)
ROM_A15: U1.6 U6.2 | length 1724.8
  Top Layer w7: U1.6 2249.53,3210 v1(2320,3210) ; v1(3450,3900) 3456.51,3893.49 3456.51,3796.19 U6.2
  Bottom Layer w7: v1(2320,3210) 2345,3210 2455.49,3320.49 2455.49,3399.29 2512.7,3456.5 2738.12,3456.5 3016.12,3734.51 3319.49,3734.51 3342.6,3757.62 3430,3757.62 3456.51,3784.13 3456.51,3893.49 v1(3450,3900)
ROM_A16: U1.8 U6.1 | length 1727.3
  Top Layer w7: U1.8 2246.54,3150 v1(2320,3150) ; U6.1 3475,3870 v1(3480,3875)
  Bottom Layer w7: v1(2320,3150) 2468.49,3298.49 2468.49,3393.91 2518.08,3443.5 2743.5,3443.5 3021.51,3721.51 3324.87,3721.51 3347.98,3744.62 3439.62,3744.62 3480,3785 v1(3480,3875)
ROM_A17: U1.14 U6.48 | length 1263.6
  Top Layer w7: U1.14 2370.51,3025.51 2395.95,3050.95 v1(2633.17,3050.95) ; U6.48 3475,3060 v1(3485,3070)
  Bottom Layer w7: v1(2633.17,3050.95) 2633.17,3031.83 2636.49,3028.51 2820.99,3028.51 2825,3024.5 3439.5,3024.5 v1(3485,3070)
ROM_A18: U1.39 U6.17 | length 1059.6
  Top Layer w7: U1.39 2465,3496.62 2551.38,3583 2629.49,3583 2638,3574.49 2694.91,3574.49 2740,3619.58 v1(2740.42,3619.58) ; U6.17 3160.04,3889.96 3160,3890 v1(3165,3890)
  Bottom Layer w7: v1(2740.42,3619.58) 2792.3,3619.58 2984.23,3811.51 3135,3811.51 3163.49,3840 3163.49,3888.49 v1(3165,3890)
ROM_A19: U1.40 U6.16 | length 1052
  Top Layer w7: U1.40 2433.5,3483.5 2546,3596 v1(2665,3596) ; U6.16 3179.72,3859.72 3180,3860 v1(3185,3860)
  Bottom Layer w7: v1(2665,3596) 2666,3597 2788.11,3597 2989.61,3798.51 3160,3798.51 3185,3823.51 v1(3185,3860) v1@3180,3860
ROM_A20: U1.3 U6.9 | length 1526.5
  Top Layer w7: U1.3 2245.04,3310 v1(2320,3310) ; v1(3315,3910) 3317.52,3907.52 U6.9
  Bottom Layer w7: v1(2320,3310) 2375,3310 2429.49,3364.49 2429.49,3410.06 2501.93,3482.5 2727.35,3482.5 3005.35,3760.51 3265,3760.51 3316.51,3812.02 3316.51,3908.49 v1(3315,3910) v1@3320,3910
ROM_A21: U1.2 U6.10 | length 1405.6
  Top Layer w7: U1.2 2315.98,3340.98 v1(2320,3345) ; v1(3295,3875) 3297.84,3872.16 U6.10
  Bottom Layer w7: v1(2320,3345) 2370,3345 2416.49,3391.49 2416.49,3415.45 2496.54,3495.5 2721.96,3495.5 2999.97,3773.51 3259.62,3773.51 3295,3808.89 v1(3295,3875)
ROM_A22: U1.1 U6.13 | length 1357
  Top Layer w6: U1.1 2312.48,3372.48 v1(2320,3380) ; U6.13 3238.78,3853.78 3255,3870 v1(3260,3870)
  Bottom Layer w6: v1(2320,3380) 2320,3375 2358.37,3375 2491.37,3508 2716.78,3508 2994.79,3786.01 3235,3786.01 3260,3811.01 v1(3260,3870) v1@3255,3875
ROM_CS: U1.23 U6.26 | length 429.8
  Top Layer w7: U1.23 2687.95,3060 v1(2740,3060) ; v1(3039.79,3074.79) 3040.21,3074.79 3041.93,3073.07 U6.26
  Bottom Layer w7: v1(2740,3060) 3022.75,3060 3037.54,3074.79 v1(3039.79,3074.79)
RST: U1.28 U6.12 | length 1092.5
  Top Layer w7: U1.28 2800,3215 2837.5,3252.5 2837.5,3499.12 2845,3506.62 2845,3555 2945,3655 v1(2990,3655) v1@2995,3650 ; v1(3249.98,3643.49) 3249.98,3644.98 3258.47,3653.47 U6.12
  Bottom Layer w7: v1(2990,3655) 2990,3650 2996.51,3643.49 v1(3249.98,3643.49) v1@3253.08,3643.49
TCK: JTAG.2 U1.11 | length 219.6
  Top Layer w7: JTAG.2 2089.03,3035.97 2183.46,3035.97 2205.01,3057.52 U1.11
TDI: JTAG.4 U1.9 | length 217.1
  Top Layer w7: JTAG.4 2104.49,3120.51 U1.9
TDO: JTAG.3 U1.24 | length 585.2
  Top Layer w7: v1(2320,3115) 2320,3125 2550,3125 2585.98,3089.02 U1.24
  Bottom Layer w7: JTAG.3 2260,3175 v1(2320,3115)
TMS: JTAG.1 U1.10 | length 100.3
  Top Layer w7: JTAG.1 2164.02,3089.02 U1.10
WR: U1.27 U3.40 U6.11 U7.5 | length 2792.6
  Top Layer w6: U3.40 2352.48,2787.48 v1(2370,2805) ; v1(2545,3185) 2683.98,3185 U1.27 2803.5,3183.5 2850,3230 2850,3493.94 2860,3503.94 2860,3525 v1(2965,3630) v1@2970,3625 ; U6.11 3278.15,3641.85 v1(3280,3640) ; U7.5 v1(3781.26,4168.74)
  Bottom Layer w6: v1(2370,2805) 2398,2833 2398,3024.97 2555,3181.97 2555,3185 v1(2545,3185) ; v1(2965,3630) 2970,3625 3238.77,3625 3241.28,3622.48 3258.69,3622.48 3276.2,3640 v1(3280,3640) 3290,3630 3530,3630 3781.26,3881.26 v1(3781.26,4168.74)
pads on no net: CART.2 CART.30 CART.31 U1.12 U3.2 U3.3 U3.5 U3.6 U3.8 U3.41 U3.43 U3.44 U3.46 U3.47 U6.15 U6.30 U6.32 U6.34 U6.36 U6.39 U6.41 U6.43 U7.9

## Polygon pours and split planes (outlines as drawn)
GND on Top Layer (solid, pour order 40): 3912.36,2310 3912.36,2375 3995,2375 3995,4350.55 3802.56,4350.55 3802.56,4464.17 1885,4464.17 1885.04,4464.13 1885.04,2375.16 1967.4,2375.16 1967.4,2310
GND on Top Layer (solid, pour order 34): 3926,2325
GND on Top Layer (solid, pour order 24): 2561.53,3674
GND on Top Layer (solid, pour order 4): 6013,2756
GND on Bottom Layer (solid, pour order 16): 3912.36,2028.35 3912.36,2375 3995,2375 3995,4350.55 3802.56,4350.55 3802.56,4464.17 1885,4464.17 1885.04,4464.13 1885.04,2375.16 1967.4,2375.16 1967.4,2028.35

## Keep-outs
Keep-Out Layer:
  the board outline again, w10

## Silkscreen, mask and mechanical layers (free items; w line width, h text height)
Bottom Overlay:
  drawing of 3317 lines, arcs and shapes, not listed
  text "Designed by Wenting Zhang & osfg     Rev.3" at 3802.56,4350.55 h95
  text "Cart" at 2890,3475 h240
  text "Neko" at 3385,3475 h240
  text "cnVintage.org" at 3190,3380 h100

## Text inside footprints (layer, text, board x,y; h text height)
JTAG: Top Overlay "6" at 2070,3335 h50 r90; Top Overlay "5" at 2170,3335 h50 r90; Top Overlay "2" at 2070,2975 h50 r90; Top Overlay "1" at 2170,2995 h50 r90